# Altium PCB TIDA-01486E1_PCB.PcbDoc (part 1 of 3)
Units mil, origin at the board's own origin, x right, y up, seen from the top; angles counter-clockwise.
Board outline 4100 x 3000 mil, 4 copper layers (Top Layer, Signal Layer 1, Signal Layer 2, Bottom Layer), stack 61.6 mil thick; 140 components, 71 nets, 368 pads, 137 vias.
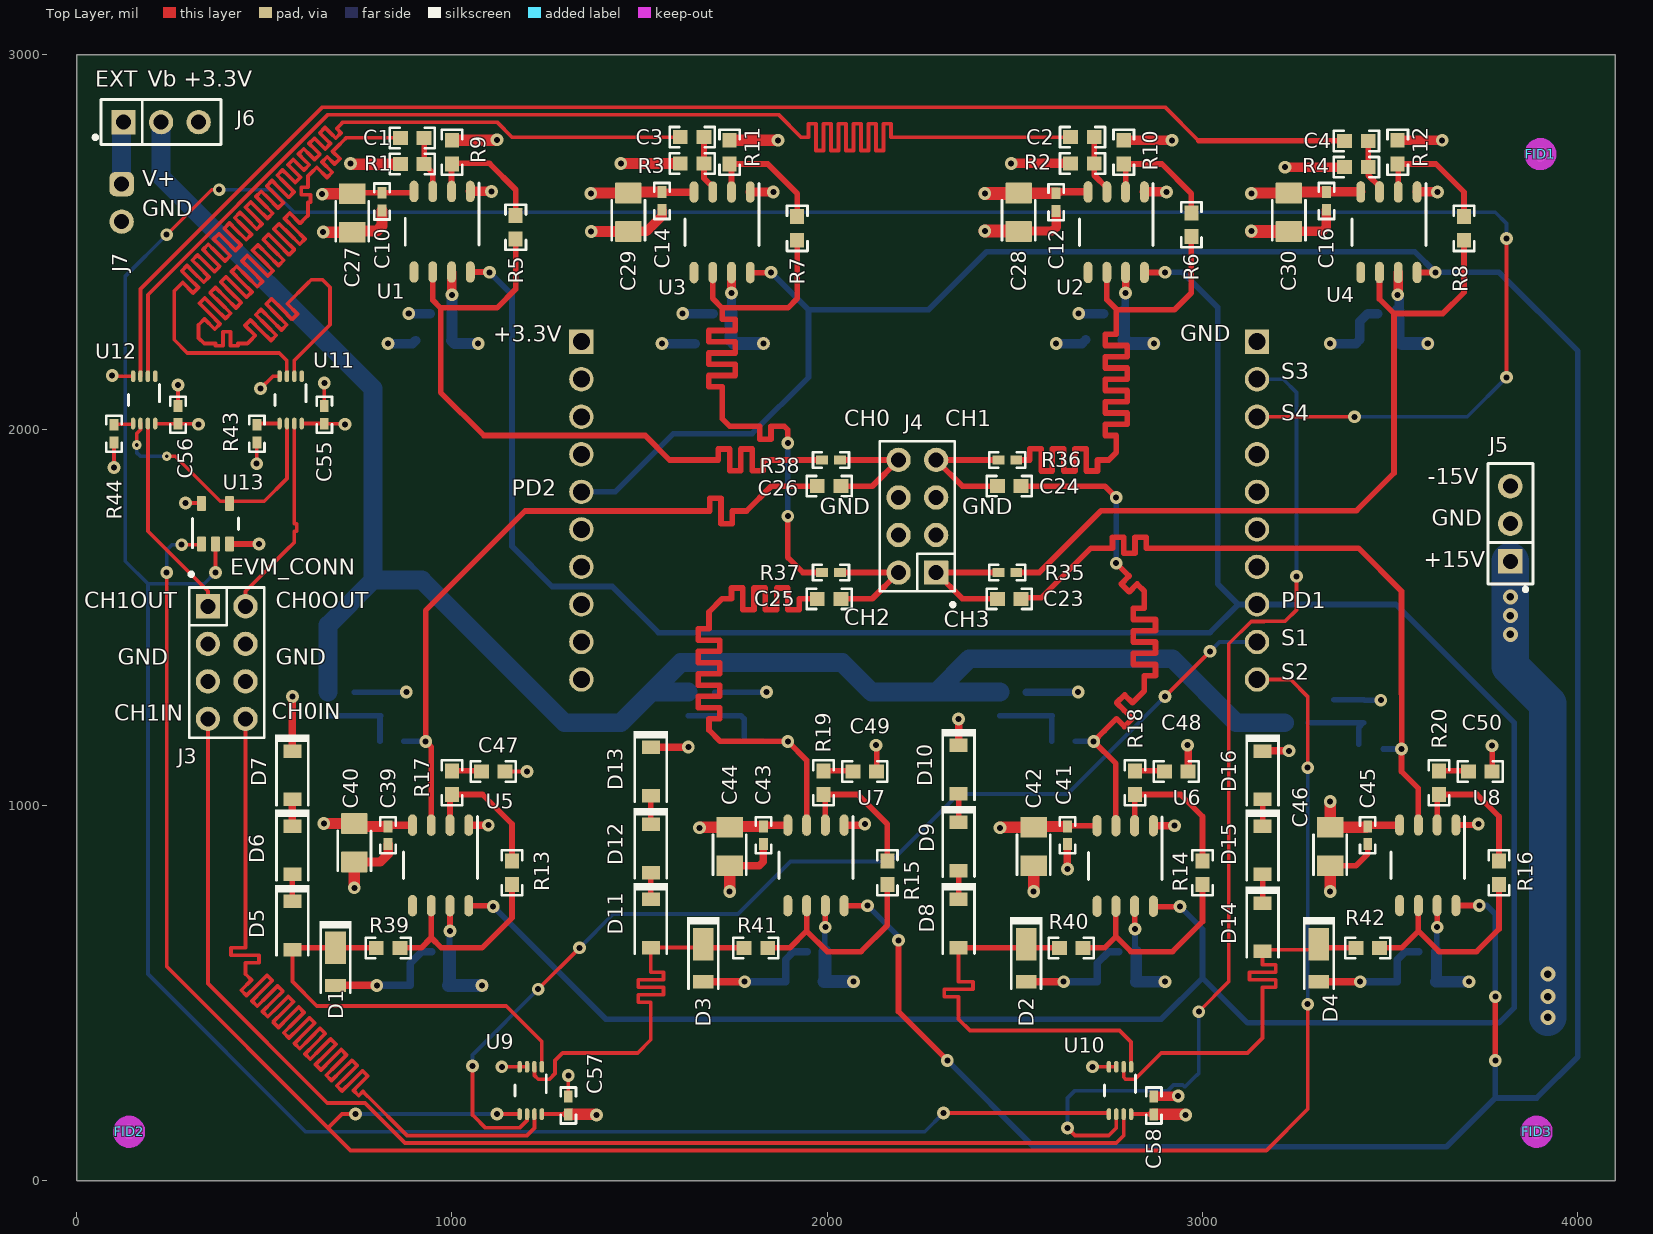
[diagram p0: Top Layer view]
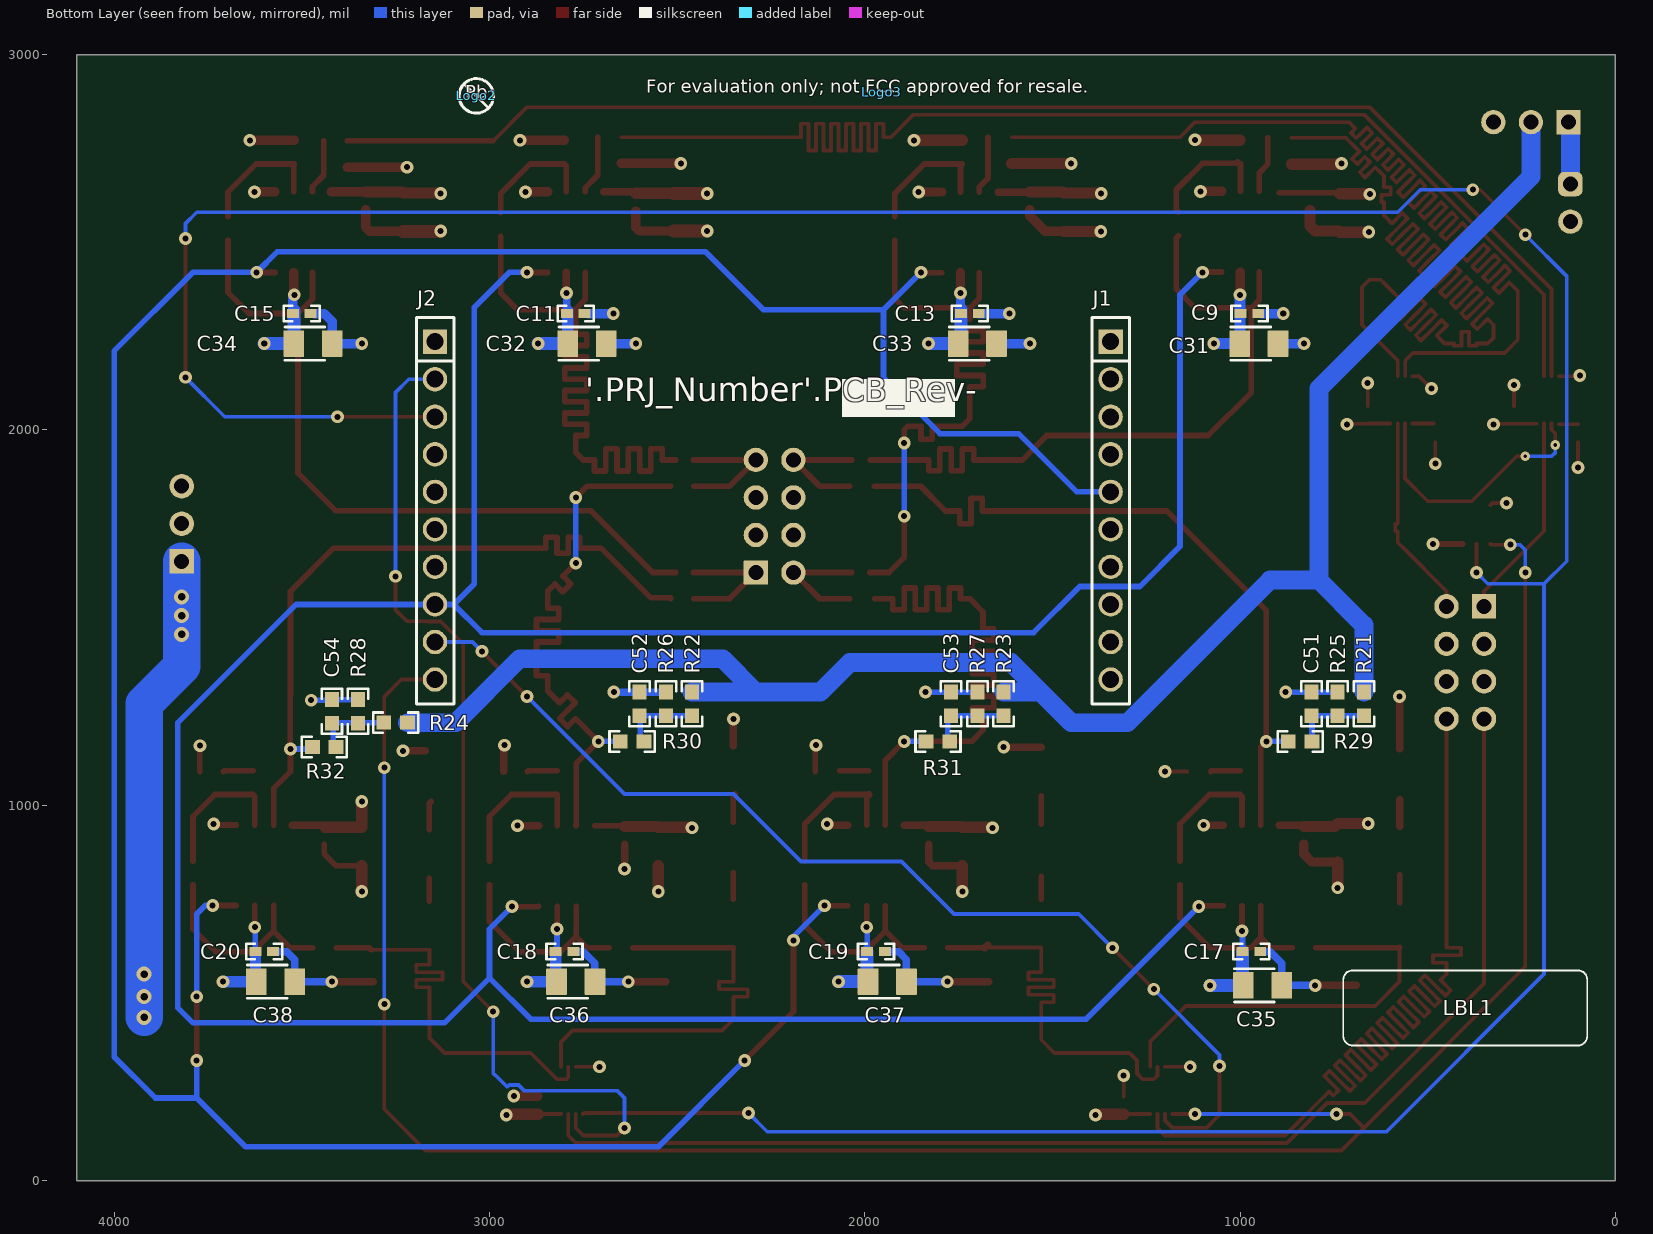
[diagram p1: Bottom Layer view, seen from below]
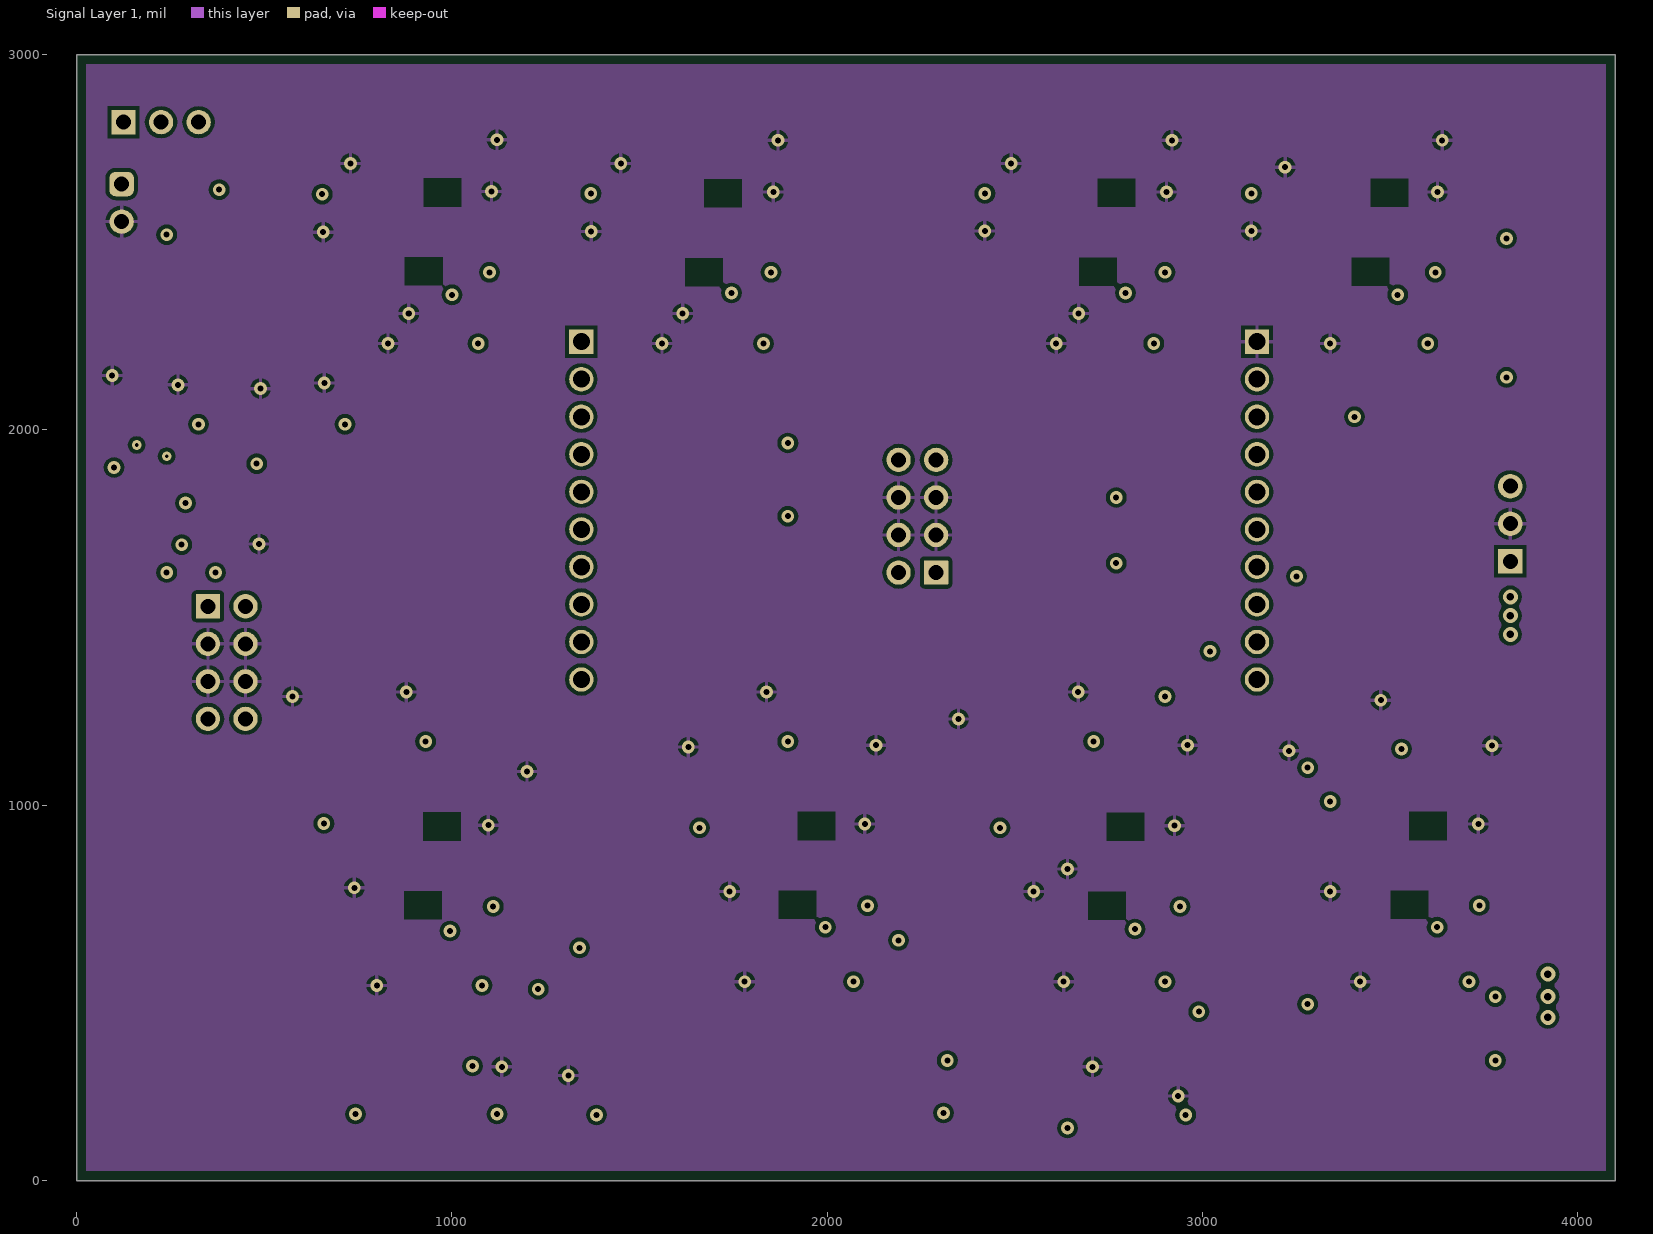
[diagram p2: Signal Layer 1]
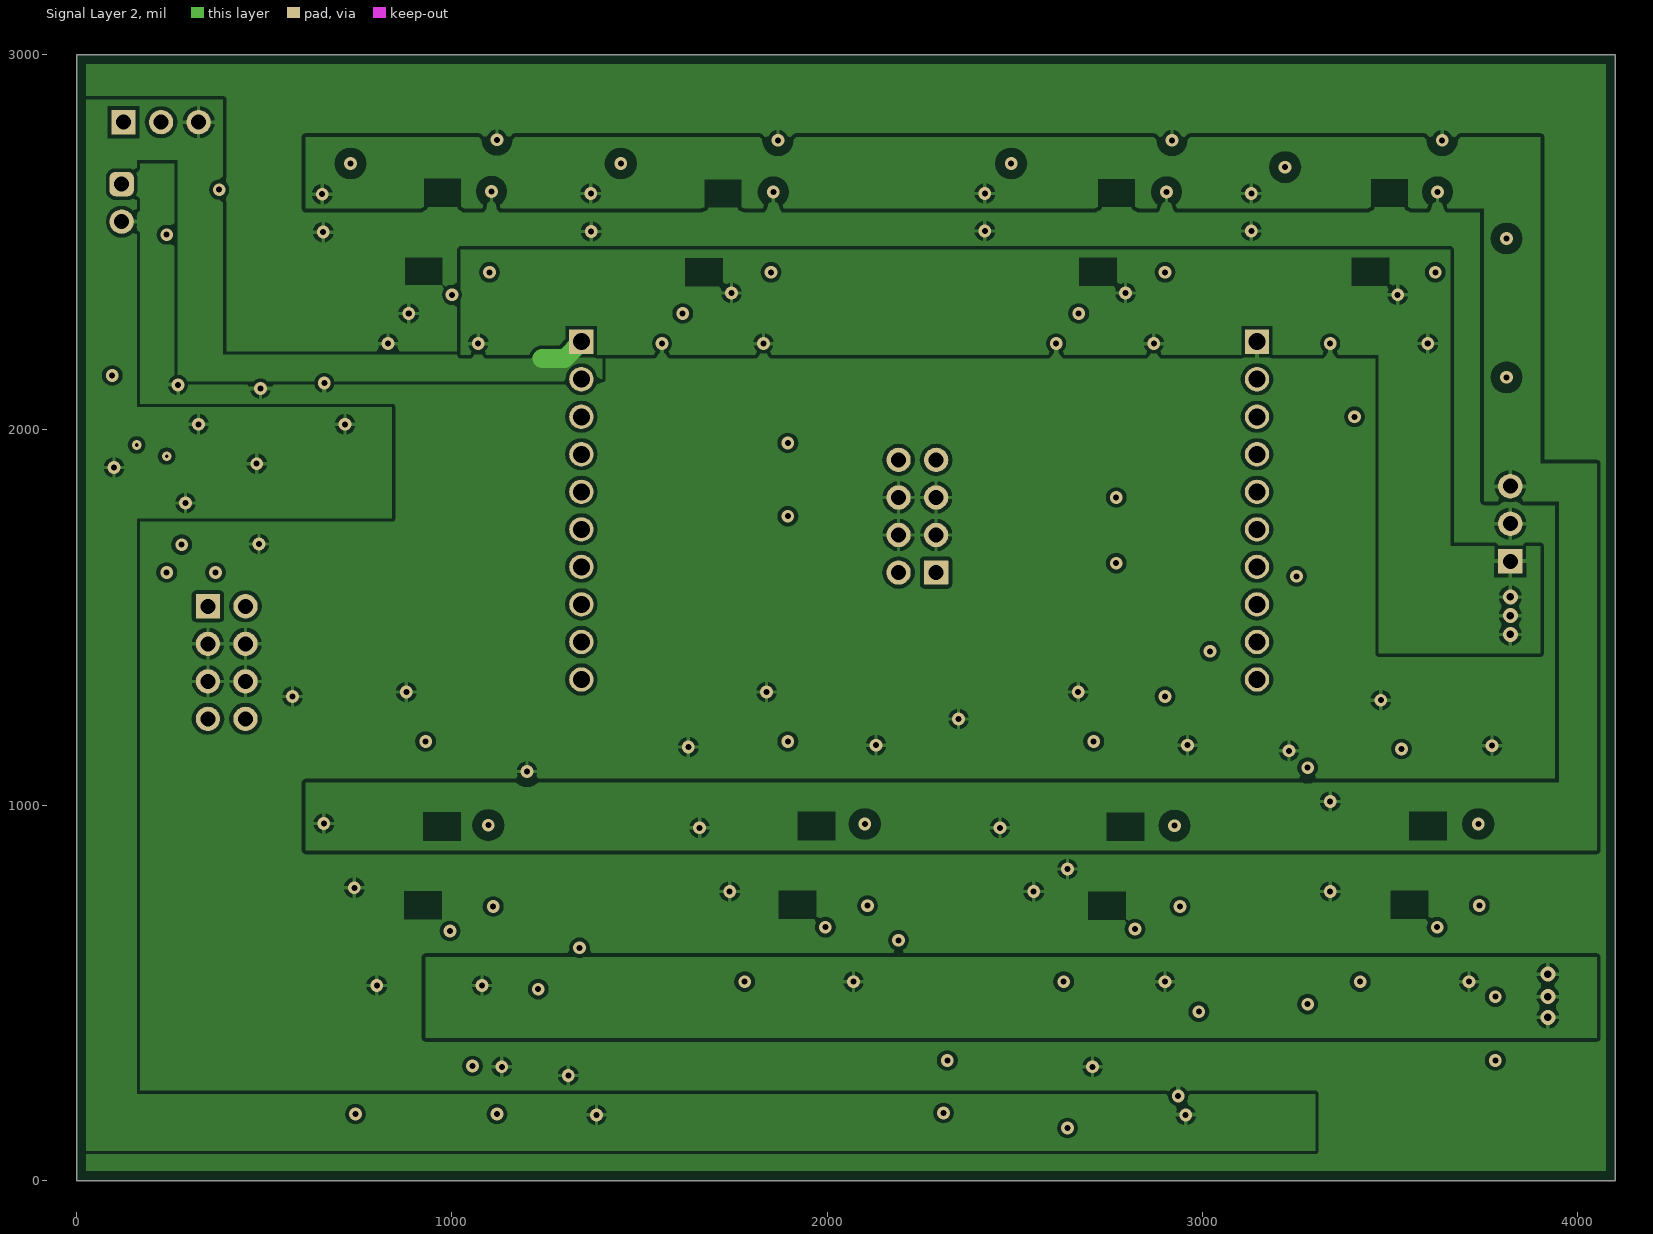
[diagram p3: Signal Layer 2]

## Layer stack, top to bottom
Top Solder: solder mask 0.4, Solder Resist, Dk 3.5
Top Layer: signal copper 1.4
Dielectric 1: prepreg 8, FR-4, Dk 4.2
Signal Layer 1: signal copper 1.4
Dielectric 2: core 40, FR-4, Dk 4.2
Signal Layer 2: signal copper 1.4
Dielectric 3: prepreg 8, FR-4, Dk 4.2
Bottom Layer: signal copper 1.4
Bottom Solder: solder mask 0.4, Solder Resist, Dk 3.5

## Board outline
0,0 4100,0 4100,3000 0,3000

## Design rules (kind name [scope] priority, off if disabled: settings)
AcuteAngle [All] p1: minimum=4.50000000000000E+0001 checktracksonly=FALSE
AssemblyTestPointUsage [All] p1: valid=2
BoardOutlineClearance BoardOutlineClearance_MountingHoles [OnCopper and InComponentClass('Mounting Holes')] p1: gap=40 ignorepadtopadclearanceinfootprint=FALSE
BoardOutlineClearance BoardOutlineClearance_Poly [OnCopper and IsPoly] p2: gap=25 ignorepadtopadclearanceinfootprint=FALSE
BoardOutlineClearance [OnCopper and Not InComponentClass('Logo') and not InComponentClass('FiducialMark') and not InRegion(1000,500,4000,800) and not InPoly] p3: gap=75 ignorepadtopadclearanceinfootprint=FALSE
Clearance Clearance_Keepouts [((IsTrack Or IsArc) And Not InPoly) And IsFree and IsKeepOut vs ((IsTrack Or IsArc) And Not InPoly) And IsFree and IsKeepOut] p1: gap=0 ignorepadtopadclearanceinfootprint=FALSE
Clearance Clearance_Poly [InPolygon] p2: gap=21 ignorepadtopadclearanceinfootprint=TRUE except(0: Arc-Hole Track-Hole SMDPad-Hole THPad-Hole Via-Hole Fill-Hole Poly-Hole Region-Hole Text-Hole; 10: Arc-Fill Arc-Poly Arc-Region Track-Fill Track-Poly Track-Region SMDPad-Fill SMDPad-Poly SMDPad-Region THPad-Fill THPad-Poly THPad-Region Via-Fill Via-Poly Via-Region Fill-Fill Fill-Poly Fill-Region Poly-Poly Poly-Region Region-Region)
Clearance Clearance_FiducialMark [IsKeepOut and InComponentClass('FiducialMark') vs IsPad and InComponentClass('FiducialMark')] p3: gap=0 ignorepadtopadclearanceinfootprint=FALSE
Clearance [All] p4: gap=7.87 ignorepadtopadclearanceinfootprint=FALSE except(0: Arc-Hole Track-Hole SMDPad-Hole THPad-Hole Via-Hole Fill-Hole Poly-Hole Region-Hole Text-Hole)
ComponentClearance ComponentClearance_MountingHoles_FiducialMarks [InComponentClass('Mounting Holes') vs InComponentClass('FiducialMark')] p1: gap=50 collisioncheckmode=3 verticalgap=10 showdistances=FALSE
ComponentClearance ComponentClearance_Shunt [InComponentClass('Header') vs InComponentClass('Shunt')] p2: gap=0 collisioncheckmode=3 verticalgap=0 showdistances=FALSE
ComponentClearance ComponentClearance_Logo [InComponentClass('Logo')] p3: gap=50 collisioncheckmode=3 verticalgap=10 showdistances=FALSE
ComponentClearance ComponentClearance_ScrewToNut [(HasFootprint('NY PMS 440 0025 PH')) vs (HasFootprint('Keystone_1902C'))] p4: gap=5 collisioncheckmode=3 verticalgap=10 showdistances=FALSE
ComponentClearance ComponentClearance_MountingHoles [InComponentClass('Mounting Holes')] p5: gap=250 collisioncheckmode=3 verticalgap=100000 showdistances=FALSE
ComponentClearance ComponentClearance_SmallPassives [HasFootprint('0201*') or HasFootprint('0402*') or HasFootprint('0508') or HasFootprint('0603*') or HasFootprint('0612') or HasFootprint('0805*') or HasFootprint('0815*') or HasFootprint('0830*') or HasFootprint('1206*') or HasFootprint('1210*') or HasFootprint('1808*') or HasFootprint('1812*') or HasFootprint('1825*') or HasFootprint('2010*') or HasFootprint('2220*') or HasFootprint('2225*') or HasFootprint('2512*') or HasFootprint('2728*') or HasFootprint('3518*') vs HasFootprint('0201*') or HasFootprint('0402*') or HasFootprint('0508') or HasFootprint('0603*') or HasFootprint('0612') or HasFootprint('0805*') or HasFootprint('0815*') or HasFootprint('0830*') or HasFootprint('1206*') or HasFootprint('1210*') or HasFootprint('1808*') or HasFootprint('1812*') or HasFootprint('1825*') or HasFootprint('2010*') or HasFootprint('2220*') or HasFootprint('2225*') or HasFootprint('2512*') or HasFootprint('2728*') or HasFootprint('3518*')] p6: gap=14.96 collisioncheckmode=3 verticalgap=10 showdistances=FALSE
ComponentClearance ComponentClearance_THtoSMT [IsThruComponent vs IsSMTComponent] p7: gap=40 collisioncheckmode=3 verticalgap=30 showdistances=FALSE
ComponentClearance ComponentClearance_THtoTH [IsThruComponent vs IsThruComponent] p8: gap=30 collisioncheckmode=3 verticalgap=30 showdistances=FALSE
ComponentClearance [All] p9: gap=30 collisioncheckmode=3 verticalgap=10 showdistances=FALSE
DiffPairsRouting [All] p1: maxlimit=100 minlimit=10 mostfreqgap=10 toplayer_minwidth=15 toplayer_maxwidth=15 toplayer_prefwidth=15 midlayer1_minwidth=15 midlayer1_maxwidth=15 midlayer1_prefwidth=15 midlayer2_minwidth=15 midlayer2_maxwidth=15 midlayer2_prefwidth=15 bottomlayer_minwidth=15 bottomlayer_maxwidth=15 bottomlayer_prefwidth=15 maxuncoupledlength=1000
FabricationTestPointUsage TestPointUsage [All] p1: valid=2 allowmultiple=FALSE
FabricationTestpoint Testpoint [All] p1: side=3 testpointundercomponent=TRUE minsize=40 maxsize=100 preferedsize=60 minholesize=0 maxholesize=40 preferedholesize=32 testpointgrid=1 allowsidetop=TRUE allowsidebottom=TRUE usegrid=TRUE gridtolerance=0.01
FanoutControl Fanout_LCC [IsLCC] p1: bgadir=Out bgaviamode=Centered fanoutstyle=Auto fanoutdirection=Alternating viagrid=1 // Fanout_LCC (Default Rule)
FanoutControl Fanout_BGA [IsBGA] p2: bgadir=Out bgaviamode=Centered fanoutstyle=Auto fanoutdirection=Alternating viagrid=1 // Fanout_BGA (Default Rule)
FanoutControl Fanout_Default [All] p4: bgadir=Out bgaviamode=Centered fanoutstyle=Auto fanoutdirection=Alternating viagrid=1 // Fanout_Default (Default Rule)
FanoutControl Fanout_Small [(CompPinCount < 5)] p5: bgadir=Out bgaviamode=Centered fanoutstyle=Auto fanoutdirection=OutThenIn viagrid=1 // Fanout_Small (Default Rule)
HoleSize [All] p1: absolutevalues=TRUE maxlimit=251 minlimit=7.87 maxpercent=80.000 minpercent=20.000
MinimumAnnularRing MinimumAnnularRing_ThermalPadVias [IsVia and InAnyComponent] p1: minimumring=5.91
MinimumAnnularRing [All] p2: minimumring=8
MinimumSolderMaskSliver MinimumSolderMaskSliver_Logo [InComponentClass('Logo') vs InComponentClass('Logo')] p1: minsoldermaskwidth=0.7
MinimumSolderMaskSliver [All] p2: minsoldermaskwidth=3.94
PlaneConnect [All] p1: planeconnectstyle=Relief reliefexpansion=10 reliefentries=4 reliefconductorwidth=10 reliefairgap=10
PolygonConnect [All] p1: connectstyle=Relief reliefconductorwidth=10 reliefentries=4 polygonreliefangle="90 Angle" airgapwidth=10
RoutingVias ThermalPadVias [IsVia and InAnyComponent] p1: holewidth=7.87 width=19.68 viastyle="Through Hole" minholewidth=7.87 minwidth=19.68 maxholewidth=12.99 maxwidth=23.62
RoutingVias [All] p2: holewidth=16 width=34 viastyle="Through Hole" minholewidth=7.87 minwidth=26 maxholewidth=40 maxwidth=65
SilkToBoardRegionClearance [Not ((IsComment or IsDesignator) And (Hide <> 'False')) and not InRegion(1000,500,4000,800)] p1:
SilkToSilkClearance SilkToSilkClearance_Pb-FreeLogo [(HasFootprint('Pb-Free_Overlay_Medium') OR HasFootprint('Pb-Free_Overlay_Small')) vs (HasFootprint('Pb-Free_Overlay_Medium') OR HasFootprint('Pb-Free_Overlay_Small'))] p1: silktosilkclearance=0
SilkToSilkClearance [All] p2: silktosilkclearance=4
SilkToSolderMaskClearance SilkToComponentPadClearance [(IsPad or IsFill or IsRegion) and InAnycomponent] p1: minsilkscreentomaskgap=3 clearancetoexposedcopper=TRUE
SilkToSolderMaskClearance "Silk to Solder Mask Opening" [All] p2: minsilkscreentomaskgap=4 clearancetoexposedcopper=FALSE
SolderMaskExpansion [All] p1: expansion=1.97
Width [All] p1: maxlimit=100 minlimit=6 preferedwidth=10 checkconnectedcopper=TRUE
15 further rules are at their usual default settings.

## Classes and differential pairs
component class Header: J3 J4 J5 J6 J7
component class TIDA-01486E1_Schematic: C1 C2 C3 C4 C9 C10 C11 C12 C13 C14 C15 C16 C17 C18 C19 C20 C23 C24 C25 C26 C27 C28 C29 C30 C31 C32 C33 C34 C35 C36 C37 C38 C39 C40 C41 C42 C43 C44 C45 C46 C47 C48 C49 C50 C51 C52 C53 C54 C55 C56 C57 C58 D1 D2 D3 D4 D5 D6 D7 D8 D9 D10 D11 D12 D13 D14 D15 D16 J1 J2 J3 J4 J5 J6 J7 R1 R2 R3 R4 R5 R6 R7 R8 R9 R10 R11 R12 R13 R14 R15 R16 R17 R18 R19 R20 R21 R22 R23 R24 R25 R26 R27 R28 R29 R30 R31 R32 R35 R36 R37 R38 R39 R40 R41 R42 R43 R44 U1 U2 U3 U4 U5 U6 U7 U8 U9 U10 U11 U12 U13
component class TIDA-01486E1_Hardware: FID1 FID2 FID3 LBL1 Logo2 Logo3 ZZ1 ZZ2 ZZ3 ZZ4
component class FiducialMark: FID1 FID2 FID3
component class AssemblyNote: ZZ1 ZZ2 ZZ3 ZZ4
component class Label: LBL1

## Components (designator, comment, footprint, x,y, rotation, side; value= is the part's Value field where it differs from the comment)
C1 "GRM188R71H102JA01D" 0603 894.36,2778.15 r180 top value=1000pF
C2 "GRM188R71H102JA01D" 0603 2680,2780 r180 top value=1000pF
C3 "GRM188R71H102JA01D" 0603 1640,2780 r180 top value=1000pF
C4 "GRM188R71H102JA01D" 0603 3410,2770 r180 top value=1000pF
C9 "GRM155R71E104KE14D" 0402 975,2310 r180 bottom value=0.1uF
C10 "GRM155R71E104KE14D" 0402 814.04,2608.46 r270 top value=0.1uF
C11 "GRM155R71E104KE14D" 0402 2770,2310 r180 bottom value=0.1uF
C12 "GRM155R71E104KE14D" 0402 2610,2606.8 r270 top value=0.1uF
C13 "GRM155R71E104KE14D" 0402 1720,2310 r180 bottom value=0.1uF
C14 "GRM155R71E104KE14D" 0402 1560,2610 r270 top value=0.1uF
C15 "GRM155R71E104KE14D" 0402 3500,2310 r180 bottom value=0.1uF
C16 "GRM155R71E104KE14D" 0402 3330,2610 r270 top value=0.1uF
C17 "GRM155R71E104KE14D" 0402 970,610 r180 bottom value=0.1uF
C18 "GRM155R71E104KE14D" 0402 2800,610 r180 bottom value=0.1uF
C19 "GRM155R71E104KE14D" 0402 1970,610 r180 bottom value=0.1uF
C20 "GRM155R71E104KE14D" 0402 3600,610 r180 bottom value=0.1uF
C23 "GRM1885C1H102FA01J" 0603 2485,1550 r0 top value=1000pF
C24 "GRM1885C1H102FA01J" 0603 2485,1850 r0 top value=1000pF
C25 "GRM1885C1H102FA01J" 0603 2005,1550 r0 top value=1000pF
C26 "GRM1885C1H102FA01J" 0603 2005,1850 r0 top value=1000pF
C27 "TPSA685K020R1000" 3216-18 734.36,2578.15 r90 top value=6.8uF
C28 "TPSA685K020R1000" 3216-18 2510,2580 r90 top value=6.8uF
C29 "TPSA685K020R1000" 3216-18 1470,2580 r90 top value=6.8uF
C30 "TPSA685K020R1000" 3216-18 3230,2580 r90 top value=6.8uF
C31 "TPSA685K020R1000" 3216-18 950,2230 r180 bottom value=6.8uF
C32 "TPSA685K020R1000" 3216-18 2740,2230 r180 bottom value=6.8uF
C33 "TPSA685K020R1000" 3216-18 1700,2230 r180 bottom value=6.8uF
C34 "TPSA685K020R1000" 3216-18 3470,2230 r180 bottom value=6.8uF
C35 "TPSA685K020R1000" 3216-18 940,520 r180 bottom value=6.8uF
C36 "TPSA685K020R1000" 3216-18 2770,530 r180 bottom value=6.8uF
C37 "TPSA685K020R1000" 3216-18 1940,530 r180 bottom value=6.8uF
C38 "TPSA685K020R1000" 3216-18 3570,530 r180 bottom value=6.8uF
C39 "GRM155R71E104KE14D" 0402 830,920 r270 top value=0.1uF
C40 "TPSA685K020R1000" 3216-18 740,900 r90 top value=6.8uF
C41 "GRM155R71E104KE14D" 0402 2640,920 r270 top value=0.1uF
C42 "TPSA685K020R1000" 3216-18 2550,890 r90 top value=6.8uF
C43 "GRM155R71E104KE14D" 0402 1830,920 r270 top value=0.1uF
C44 "TPSA685K020R1000" 3216-18 1740,890 r90 top value=6.8uF
C45 "GRM155R71E104KE14D" 0402 3440,920 r270 top value=0.1uF
C46 "TPSA685K020R1000" 3216-18 3340,890 r90 top value=6.8uF
C47 "GMK107AB7105KAHT" 0603 1110,1090 r0 top value=1uF
C48 "GMK107AB7105KAHT" 0603 2930,1090 r0 top value=1uF
C49 "GMK107AB7105KAHT" 0603 2100,1090 r0 top value=1uF
C50 "GMK107AB7105KAHT" 0603 3740,1090 r0 top value=1uF
C51 "EMK107BB7225MA-T" 0603 810,1270 r90 bottom value=2.2uF
C52 "EMK107BB7225MA-T" 0603 2600,1270 r90 bottom value=2.2uF
C53 "EMK107BB7225MA-T" 0603 1770,1270 r90 bottom value=2.2uF
C54 "EMK107BB7225MA-T" 0603 3420,1250 r90 bottom value=2.2uF
C55 "GRM155R71E104KE14D" 0402 660,2040 r90 top value=0.1uF
C56 "GRM155R71E104KE14D" 0402 270,2040 r90 top value=0.1uF
C57 "GRM155R71E104KE14D" 0402 1310,200 r90 top value=0.1uF
C58 "GRM155R71E104KE14D" 0402 2870,200 r90 top value=0.1uF
D1 "DFLS130L-7" PowerDI123 690,570 r270 top value=30V
D2 "DFLS130L-7" PowerDI123 2530,580 r270 top value=30V
D3 "DFLS130L-7" PowerDI123 1670,580 r270 top value=30V
D4 "DFLS130L-7" PowerDI123 3310,580 r270 top value=30V
D5 "1N4148W-7-F" SOD-123 575,680 r270 top value=100V
D6 "1N4148W-7-F" SOD-123 575,880 r270 top value=100V
D7 "1N4148W-7-F" SOD-123 575,1080 r270 top value=100V
D8 "1N4148W-7-F" SOD-123 2350,685 r270 top value=100V
D9 "1N4148W-7-F" SOD-123 2350,890 r270 top value=100V
D10 "1N4148W-7-F" SOD-123 2350,1095 r270 top value=100V
D11 "1N4148W-7-F" SOD-123 1530,685 r270 top value=100V
D12 "1N4148W-7-F" SOD-123 1530,885 r270 top value=100V
D13 "1N4148W-7-F" SOD-123 1530,1090 r270 top value=100V
D14 "1N4148W-7-F" SOD-123 3160,675 r270 top value=100V
D15 "1N4148W-7-F" SOD-123 3160,880 r270 top value=100V
D16 "1N4148W-7-F" SOD-123 3160,1080 r270 top value=100V
FID1 "Fiducial" Fiducial10-20 3900,2734.81 r0 top
FID2 "Fiducial" Fiducial10-20 140,130 r0 top
FID3 "Fiducial" Fiducial10-20 3890,130 r0 top
J1 "SSW-110-23-F-S" CONN_SSW-110-23-F-S 1345,1785 r90 bottom
J2 "SSW-110-23-F-S" CONN_SSW-110-23-F-S 3145,1785 r90 bottom
J3 "TSW-104-07-G-D" TSW-104-07-G-D 400,1380 r270 top
J4 "TSW-104-07-G-D" TSW-104-07-G-D 2240,1770 r90 top
J5 "TSW-103-07-G-S" TSW-103-07-X-S 3820,1750 r90 top
J6 "TSW-103-07-G-S" TSW-103-07-X-S 225,2820 r0 top
J7 "TSW-102-07-G-S" TSW-102-07-G-S 120,2605 r270 top
LBL1 "Size: 0.65\" x 0.20 \"" Label_650x200 400,460 r180 bottom
Logo2 "Pb-Free Symbol" Pb-Free_Overlay_Small 3035,2890 r180 bottom
Logo3 "FCC disclaimer" FCC_disclaimer 1955,2900 r180 bottom
R1 "RC0603FR-071KL" 0603 894.36,2708.15 r0 top value=1.00k
R2 "RC0603FR-071KL" 0603 2680,2710 r0 top value=1.00k
R3 "RC0603FR-071KL" 0603 1640,2710 r0 top value=1.00k
R4 "RC0603FR-071KL" 0603 3410,2700 r0 top value=1.00k
R5 "CRCW0603866RFKEA" 0603 1170,2540 r270 top value=866
R6 "CRCW0603866RFKEA" 0603 2970,2546.8 r270 top value=866
R7 "CRCW0603866RFKEA" 0603 1920,2536.8 r270 top value=866
R8 "CRCW0603866RFKEA" 0603 3696.5,2536.8 r270 top value=866
R9 "CRCW060395R3FKEA" 0603 1000,2740 r270 top value=95.3
R10 "CRCW060395R3FKEA" 0603 2790,2740 r270 top value=95.3
R11 "CRCW060395R3FKEA" 0603 1740,2740 r270 top value=95.3
R12 "CRCW060395R3FKEA" 0603 3520,2740 r270 top value=95.3
R13 "CRCW0603866RFKEA" 0603 1160,820 r270 top value=866
R14 "CRCW0603866RFKEA" 0603 3000,820 r270 top value=866
R15 "CRCW0603866RFKEA" 0603 2160,820 r270 top value=866
R16 "CRCW0603866RFKEA" 0603 3790,820 r270 top value=866
R17 "CRCW060395R3FKEA" 0603 1000,1060 r270 top value=95.3
R18 "CRCW060395R3FKEA" 0603 2820,1060 r270 top value=95.3
R19 "CRCW060395R3FKEA" 0603 1990,1060 r270 top value=95.3
R20 "CRCW060395R3FKEA" 0603 3630,1060 r270 top value=95.3
R21 "RT0603BRD07100KL" 0603 670,1270 r270 bottom value=100k
R22 "RT0603BRD07100KL" 0603 2460,1270 r270 bottom value=100k
R23 "RT0603BRD07100KL" 0603 1630,1270 r270 bottom value=100k
R24 "RT0603BRD07100KL" 0603 3250,1220 r0 bottom value=100k
R25 "RT0603BRD0724K9L" 0603 740,1270 r270 bottom value=24.9k
R26 "RT0603BRD0724K9L" 0603 2530,1270 r270 bottom value=24.9k
R27 "RT0603BRD0724K9L" 0603 1700,1270 r270 bottom value=24.9k
R28 "RT0603BRD0724K9L" 0603 3350.07,1250 r270 bottom value=24.9k
R29 "RMCF0603ZT0R00" 0603 840,1170 r0 bottom value=0
R30 "RMCF0603ZT0R00" 0603 2620,1170 r0 bottom value=0
R31 "RMCF0603ZT0R00" 0603 1805,1170 r0 bottom value=0
R32 "RMCF0603ZT0R00" 0603 3440,1155 r0 bottom value=0
R35 "CRCW0402200RFKED" 0402 2480,1620 r180 top value=200
R36 "CRCW0402200RFKED" 0402 2480,1920 r180 top value=200
R37 "CRCW0402200RFKED" 0402 2010,1620 r180 top value=200
R38 "CRCW0402200RFKED" 0402 2010,1920 r180 top value=200
R39 "CRCW060310R0JNEAHP" 0603 830,620 r180 top value=10
R40 "CRCW060310R0JNEAHP" 0603 2650,620 r180 top value=10
R41 "CRCW060310R0JNEAHP" 0603 1810,620 r180 top value=10
R42 "CRCW060310R0JNEAHP" 0603 3440,620 r180 top value=10
R43 "CRCW040210K0JNED" 0402 480.32,1990 r90 top value=10k
R44 "CRCW040210K0JNED" 0402 100,1990 r90 top value=10k
U1 "THS3095D" D0008A_N 974.04,2528.15 r270 top
U2 "THS3095D" D0008A_N 2770,2526.8 r270 top
U3 "THS3095D" D0008A_N 1720,2526.49 r270 top
U4 "THS3095D" D0008A_N 3496.5,2526.8 r270 top
U5 "THS3095D" D0008A_N 970,839.68 r270 top
U6 "THS3095D" D0008A_N 2794.04,838.15 r270 top
U7 "THS3095D" D0008A_N 1970,839.68 r270 top
U8 "THS3095D" D0008A_N 3600,840 r270 top
U9 "TS5A3357DCUR" DCU0008A_N 1210,240 r270 top
U10 "TS5A3357DCUR" DCU0008A_N 2780,240 r270 top
U11 "TS5A3357DCUR" DCU0008A_N 570.31,2080 r270 top
U12 "TS5A3357DCUR" DCU0008A_N 180,2080 r270 top
U13 "SN74LVC1G08DBVR" DBV0005A_N 370,1750 r90 top
ZZ1 "This Assembly Note is for PCB labels only" AssemblyNoteLabel 305,5488 r0 top
ZZ2 "This Assembly Note will show in the PcbDoc and associated outputs" AssemblyNote 305,5379.11 r0 top
ZZ3 "This Assembly Note will show in the PcbDoc and associated outputs" AssemblyNote 305,5290.56 r0 top
ZZ4 "This Assembly Note will show in the PcbDoc and associated outputs" AssemblyNote 305,5202 r0 top

## Footprints (in the part's own frame and the unit in brackets; to place one, negate y for a bottom-side part, rotate by r counter-clockwise, add the part's x,y. Pads: shape width x height; smd on the part's side, far side on the other; paste and mask are expansions set on the pad)
0402 [mm] "0402 from SM-752 data"
  rect 0.8x0.6 smd: 1(-0.6,0) 2(0.6,0)
  silkscreen extent -1.22,-0.52 1.22,0.52, body extent -0.55,-0.3 0.55,0.3, height 0.6
0603 [mm] "0603 from SM-752 data"
  rect 1x0.95 smd: 1(-0.8,0) 2(0.8,0)
  silkscreen extent -1.52,-0.69 1.52,0.69, body extent -0.87,-0.47 0.87,0.47, height 1
3216-18 [mm] "Based on AVX recommendation in http://www.avx.com/download/software/literature/AVX-Footprint-Library.pdf"
  rrect7% 1.4x1.8 smd: 1(-1.3,0) 2(1.3,0)
  silkscreen extent -1.9,-1.12 0.8,1.12, body extent -1.7,-0.9 1.7,0.9, height 1.82
AssemblyNote [mil] "Assembly Note"
AssemblyNoteLabel [mil] "Assembly Note for PCB Labels"
CONN_SSW-110-23-F-S [mm] "SAMTEC"
  rect 1.65x1.65 hole 1.15: 1(11.43,0)
  round 1.65 hole 1.15: 2(8.89,0) 3(6.35,0) 4(3.81,0) 5(1.27,0) 6(-1.27,0) 7(-3.81,0) 8(-6.35,0) 9(-8.89,0) 10(-11.43,0)
  silkscreen extent -13.08,-1.27 13.08,1.27, body extent -13,-1.27 13,1.27, height 8.59
D0008A_N [mm] "SOIC, 8-Leads, Body 4.9x3.9mm, Pitch 1.27mm, IPC Medium Density"
  oval 1.45x0.6 smd: 1(-2.725,1.905) 2(-2.725,0.635) 3(-2.725,-0.635) 4(-2.725,-1.905) 5(2.725,-1.905) 6(2.725,-0.635) 7(2.725,0.635) 8(2.725,1.905)
  silkscreen extent -3.3,-2.5 0.9,2.5, body extent -3,-2.45 3,2.45, height 1.63
DBV0005A_N [mm] "SOT23, 5-Leads, Body 2.9x1.6mm, Pitch 0.95mm, Lead Span 2.8mm, IPC Medium Density"
  rrect17% 1x0.6 smd: 1(-1.375,0.95) 2(-1.375,0) 3(-1.375,-0.95) 4(1.375,-0.95) 5(1.375,0.95)
  silkscreen extent -1.63,-1.55 0.38,1.55, body extent -1.42,-1.46 1.42,1.46, height 1.09
DCU0008A_N [mm] "TSSOP, 8-Leads, Body 2x2.3mm, Pitch 0.5mm, IPC Medium Density"
  oval 0.8x0.3 smd: 1(-1.6,0.75) 2(-1.6,0.25) 3(-1.6,-0.25) 4(-1.6,-0.75) 5(1.6,-0.75) 6(1.6,-0.25) 7(1.6,0.25) 8(1.6,0.75)
  silkscreen extent -1.05,-1.05 0.38,1.05, body extent -1.56,-1 1.56,1, height 0.9
FCC_disclaimer [mil]
Fiducial10-20 [mm]
  round 1 smd mask+0.5: 1(0,0)
  Top Layer keep-out circle w1.178: c0,0 r0.5
Label_650x200 [mil] "Thermal Transfer Label"
  silkscreen extent -325,-100 325,100, body extent -325,-100 325,100, height 1
Pb-Free_Overlay_Small [mil]
  silkscreen extent -46,-46 46,46
PowerDI123 [mm] "Diodes Inc recommended land pattern, document number DS30628 Rev. 6-2"
  rect 2.2x1.4 smd: 1(-1.275,0)
  rect 0.9x1.4 smd: 2(1.275,0)
  silkscreen extent -3.1,-1.09 1.76,1.09, body extent -2.38,-0.97 1.52,0.96, height 1
SOD-123 [mm] "On Semi recommended land pattern"
  rect 0.915x1.22 smd: 1(-1.637,0) 2(1.637,0)
  silkscreen extent -2.74,-1.17 2.03,1.17, body extent -1.93,-0.9 1.93,0.9, height 1.35
TSW-102-07-G-S [mm] "Samtec 100mil, 1x2, 230 mil above insulator"
  rrect50% 1.65x1.65 hole 1.016: 1(-1.27,0)
  round 1.65 hole 1.016: 2(1.27,0)
  body extent -2.54,-1.27 2.54,1.27, height 8.38
TSW-103-07-X-S [mm] "Samtec Header, 100mil, 1x3"
  rect 1.65x1.65 hole 1.016: 1(-2.54,0)
  round 1.65 hole 1.016: 2(0,0) 3(2.54,0)
  silkscreen extent -4.57,-1.52 4.06,1.52, body extent -3.81,-1.27 3.81,1.27, height 8.38
TSW-104-07-G-D [mm] "Samtec 100mil, 2x4, 230 mil above insulator"
  rrect6% 1.65x1.65 hole 1.016: 1(-3.81,-1.27)
  round 1.65 hole 1.016: 2(-3.81,1.27) 3(-1.27,-1.27) 4(-1.27,1.27) 5(1.27,-1.27) 6(1.27,1.27) 7(3.81,-1.27) 8(3.81,1.27)
  silkscreen extent -6.1,-2.54 5.08,2.54, body extent -5.08,-2.54 5.08,2.54, height 8.38

## Part data
C1 C2 C3 C4: "CAP, CERM, 1000 pF, 50 V,+/- 5%, X7R, 0603", Cap_Case=0603, Manufacturer=MuRata, Supplier Part Number 1=490-9733-1-ND, TempCo=X7R, Tolerance_%=5, Value1=Unknown, Value2=50V, ValueDisplayed=1000pF, AEC Category=Q200, AEC Grade=N/A, AEC Qualified=N, Cap_F=0.000000001, ComponentLink1Description="Datasheet link", ComponentLink1URL=http://psearch.murata.com/capacitor/product/GRM188R71H102JA01%23.pdf, CompType=Capacitor, LatestRevisionDate=2017-06-02, MountType=SMT, PackageReference=0603, PartNumber=GRM188R71H102JA01D, Polarized=N, Published=2008-06-19, Publisher="Texas Instruments", RoHS=Y, SizeArea_mm2=1.28, SizeAreaWB_mm2=4.68, SizeX_mm=1.6, SizeY_mm=0.8, SizeZ_mm=1, Supplier 1=Digi-Key, Supplier 2=Mouser, Supplier Part Number 2=81-GRM39X102J50D, SymbolVersion=2008-07-09, TaMax_C=125, TaMin_C=-55, Technology=Ceramic, U/M=EA, VDC_V=50
C9 C10 C11 C12 C13 C14 C15 C16 C17 C18 C19 C20 C39 C41 C43 C45 C55 C56 C57 C58: "CAP, CERM, 0.1 µF, 25 V,+/- 10%, X7R, 0402", Cap_Case=0402, Manufacturer=MuRata, Supplier Part Number 1=490-10698-1-ND, TempCo=X7R, Tolerance_%=10, Value1=Unknown, Value2=25V, ValueDisplayed=0.1µF, AEC Category=Q200, AEC Grade=N/A, AEC Qualified=N, Cap_F=0.0000001, ComponentLink1Description="Datasheet link", ComponentLink1URL=http://search.murata.co.jp/Ceramy/image/img/A01X/G101/ENG/GRM155R71E104KE14-01.pdf, CompType=Capacitor, Green_EU RoHS=Passed, Green_EU RoHS-2=Incomplete, Green_Lifecycle=Active, Green_REACh=Passed, LatestRevisionDate=2017-06-02, MountType=SMT, PackageReference=0402, PartNumber=GRM155R71E104KE14D, Polarized=N, Published=2008-06-19, Publisher="Texas Instruments", RoHS=Y, SizeArea_mm2=0.5, SizeAreaWB_mm2=3, SizeX_mm=1, SizeY_mm=0.5, SizeZ_mm=0.6, Supplier 1=Digi-Key, Supplier 2=Newark, Supplier 3=Mouser, Supplier Part Number 2=31Y1751, Supplier Part Number 3=81-GRM155R71E104KE4D, SymbolVersion=2008-07-09, TaMax_C=125, TaMin_C=-55, Technology=Ceramic, U/M=EA, VDC_V=25
C23 C24 C25 C26: "CAP, CERM, 1000 pF, 50 V,+/- 1%, C0G/NP0, 0603", Cap_Case=0603, Manufacturer=MuRata, Supplier Part Number 1=490-6377-1-ND, TempCo=C0G/NP0, Tolerance_%=1, Value1=Unknown, Value2=50V, ValueDisplayed=1000pF, AEC Category=Q200, AEC Qualified=?, Cap_F=0.000000001, ComponentLink1Description="Datasheet link", ComponentLink1URL=http://search.murata.co.jp/Ceramy/image/img/A01X/G101/ENG/GRM1885C1H102FA01-01.pdf, CompType=Capacitor, Green_EU RoHS=Incomplete, Green_EU RoHS-2=Incomplete, Green_Lifecycle="Not Set", Green_REACh=Incomplete, LatestRevisionDate=2017-06-02, MountType=SMT, PackageReference=0603, PartNumber=GRM1885C1H102FA01J, Polarized=N, Published=2008-06-19, Publisher="Texas Instruments", RoHS=Y, SizeArea_mm2=1.28, SizeAreaWB_mm2=4.68, SizeX_mm=1.6, SizeY_mm=0.8, SizeZ_mm=1, Supplier 1=Digi-Key, Supplier 2=Mouser, Supplier Part Number 2=81-GRM1885C1H102FA1J, SymbolVersion=2008-07-09, TaMax_C=125, TaMin_C=-55, Technology=Ceramic, U/M=EA, VDC_V=50
C27 C28 C29 C30 C31 C32 C33 C34 C35 C36 C37 C38 C40 C42 C44 C46: "CAP, TA, 6.8 µF, 20 V, +/- 10%, 1 ohm, SMD", Cap_Case=A, Manufacturer=AVX, Supplier Part Number 1=478-3094-1-ND, Tolerance_%=10, Value1="1 ohm", Value2=20V, ValueDisplayed=6.8µF, AEC Category=Q200, AEC Qualified=?, Cap_F=0.0000068, ComponentLink1Description="Datasheet link", ComponentLink1URL=http://www.avx.com/docs/masterpubs/tantniob.pdf, CompType=Capacitor, ESR_ohm=1, IRMS_A=0.246, LatestRevisionDate=2017-03-13, LatestRevisionNote="Updated supplier links", MountType=SMT, PackageReference=3216-18, PartNumber=TPSA685K020R1000, Polarized=Y, Publisher="Texas Instruments", RoHS=Y, Series=TPS, SizeArea_mm2=5.12, SizeAreaWB_mm2=10.92, SizeX_mm=3.2, SizeY_mm=1.6, SizeZ_mm=1.8, Supplier 1=Digi-Key, Supplier 2=Newark, Supplier 3=Mouser, Supplier Part Number 2=75M2902, Supplier Part Number 3=581-TPSA685K020R1000, SymbolVersion=2008-07-09, TaMax_C=125, TaMin_C=-55, Technology=TA, U/M=EA, VDC_V=20
C47 C48 C49 C50: "CAP, CERM, 1 µF, 35 V,+/- 10%, X7R, AEC-Q200 Grade 0, 0603", Cap_Case=0603, Manufacturer="Taiyo Yuden", Supplier Part Number 1=587-3352-1-ND, TempCo=X7R, Tolerance_%=10, Value1=Unknown, Value2=35V, ValueDisplayed=1µF, AEC Category=Q200, AEC Grade=0, AEC Qualified=Y, Cap_F=0.000001, ComponentLink1Description="Datasheet link", ComponentLink1URL=http://www.yuden.co.jp/productdata/catalog/en/mlcc01_hq_e.pdf, CompType=Capacitor, LatestRevisionDate=2017-06-02, MountType=SMT, PackageReference=0603, PartNumber=GMK107AB7105KAHT, Polarized=N, Published=2008-06-19, Publisher="Texas Instruments", RoHS=Y, SizeArea_mm2=1.28, SizeAreaWB_mm2=4.68, SizeX_mm=1.6, SizeY_mm=0.8, SizeZ_mm=1, Supplier 1=Digi-Key, Supplier 2=Newark, Supplier 3=Mouser, Supplier Part Number 2=68X1426, Supplier Part Number 3=963-GMK107AB7105KAHT, SymbolVersion=2008-07-09, TaMax_C=125, TaMin_C=-55, Technology=Ceramic, U/M=EA, VDC_V=35
C51 C52 C53 C54: "CAP, CERM, 2.2 µF, 16 V,+/- 10%, X7R, 0603", Cap_Case=0603, Manufacturer="Taiyo Yuden", Supplier Part Number 1=587-4864-1-ND, TempCo=X7R, Tolerance_%=10, Value1=Unknown, Value2=16V, ValueDisplayed=2.2µF, AEC Category=Q200, AEC Grade=N/A, AEC Qualified=N, Cap_F=0.0000022, ComponentLink1Description="Datasheet link", ComponentLink1URL=http://www.yuden.co.jp/productdata/catalog/en/mlcc_all_e.pdf, CompType=Capacitor, LatestRevisionDate=2017-06-02, MountType=SMT, PackageReference=0603, PartNumber=EMK107BB7225MA-T, Polarized=N, Published=2008-06-19, Publisher="Texas Instruments", RoHS=Y, SizeArea_mm2=1.28, SizeAreaWB_mm2=4.68, SizeX_mm=1.6, SizeY_mm=0.8, SizeZ_mm=1, Supplier 1=Digi-Key, Supplier 2=Mouser, Supplier Part Number 2=963-EMK107BB7225MA-T, SymbolVersion=2008-07-09, TaMax_C=125, TaMin_C=-55, Technology=Ceramic, U/M=EA, VDC_V=16
D1 D2 D3 D4: "Diode, Schottky, 30 V, 1 A, PowerDI123", Manufacturer="Diodes Inc.", Supplier Part Number 1=DFLS130LDICT-ND, Value1=1A, Value2=0.31V, AEC Category=Q101, AEC Qualified=N, ComponentLink1Description="Datasheet link", ComponentLink1URL=http://www.diodes.com/_files/datasheets/ds30492.pdf, CompType=Diode, Green_EU RoHS=Incomplete, Green_EU RoHS-2=Incomplete, Green_Lifecycle="Not Set", Green_REACh=Incomplete, Io_A=1, LatestRevisionDate=2017-05-30, MountType=SMT, PackageReference=PowerDI123, PartNumber=DFLS130L-7, Published=2008-06-26, Publisher="Texas Instruments", RoHS=Y, SizeArea_mm2=6.586, SizeAreaWB_mm2=13.066, SizeX_mm=3.7, SizeY_mm=1.78, SizeZ_mm=0.98, Supplier 1=Digi-Key, Supplier 2=Newark, Supplier 3=Mouser, Supplier Part Number 2=12T1975, Supplier Part Number 3=621-DFLS130L, SymbolVersion=2008-12-08, TJmax_C=125, Type=Schottky, U/M=EA, Vf_V=0.31, Vr_V=30
D5 D6 D7 D8 D9 D10 D11 D12 D13 D14 D15 D16: library part CMP-0029001-1, "Diode, Ultrafast, 100 V, 0.15 A, SOD-123", Manufacturer="Diodes Inc.", Supplier Part Number 1=1N4148W-FDICT-ND, Value1=0.15A, Value2=1.25V, AEC Category=Q101, AEC Qualified=?, ComponentLink1Description="Datasheet link", ComponentLink1URL=http://www.diodes.com/datasheets/ds30086.pdf, CompType=Diode, Green_EU RoHS=Passed, Green_EU RoHS-2=Passed, Green_Lifecycle=Active, Green_REACh=Passed, Io_A=1.5dA, LatestRevisionDate=2017-05-08, MountType=SMT, PackageReference=SOD-123, PartNumber=1N4148W-7-F, Published=2008-06-26, Publisher="Texas Instruments", RoHS=Y, SizeArea_mm2=6.545, SizeAreaWB_mm2=13.095, SizeX_mm=3.85, SizeY_mm=1.7, SizeZ_mm=1.35, Supplier 1=Digi-Key, Supplier 2=Mouser, Supplier 3=Farnell, Supplier Part Number 2=621-1N4148W-F, Supplier Part Number 3=1776392, TJmax_C=150°C, Type=Ultrafast, U/M=EA, Vf_V=1.25V, Vr_V=100V
FID1 FID2 FID3: "Fiducial mark.  There is nothing to buy or mount.", Manufacturer=N/A, ClassName=FiducialMark, CompType=Fiducial, LatestRevisionDate=2016-12-05, LatestRevisionNote="Added Alternate PartNumber and Alternate Manufacturer parameters to appropriate components.", MountType=N/A, PackageReference=N/A, PartNumber=N/A, Publisher="Texas Instruments", SymbolCreator=codlsc, SymbolVersion=2009-11-4
J1 J2: library part CMP-0075441-1, "Connector, Receptacle, 100mil, 10x1, Gold plated, TH", Manufacturer=Samtec, CNHeader=False, ComponentLink1Description="Datasheet URL", ComponentLink1URL=http://www.samtec.com/technical-specifications/default.aspx?SeriesMaster=SSW, CompType="Socket Strip", CT=True, Green_EU RoHS=Passed, Green_EU RoHS-2=Passed, Green_Lifecycle=Active, Green_REACh=Passed, LatestRevisionDate=2017-07-12, MountType=TH, PackageReference="10x1 Receptacle", PartNumber=SSW-110-23-F-S, Publisher="Texas Instruments", RoHS=Y
J3 J4: library part CMP-0075408-1, "Header, 100mil, 4x2, Gold, TH", Color=Black, Current_A=6.3A, Manufacturer=Samtec, Supplier Part Number 1=SAM1028-04-ND, Voltage_V=550V, Cert_CSA=Y, Cert_CULUS=N, Cert_UL=Y, Cert_VDE=N, ClassName=Header, CNHeader=True, ComponentLink1Description="Datasheet URL", ComponentLink1URL=http://samtec.com/ftppub/pdf/TSW_TH.PDF, CompType=Header, ContactFinish=Gold, CT=False, Gender=Male, Green_EU RoHS=Passed, Green_EU RoHS-2=Passed, Green_Lifecycle=Active, Green_REACh=Passed, LatestRevisionDate=2017-07-12, MountType=TH, Orientation=Vertical, PackageReference="4x2 Header", PartNumber=TSW-104-07-G-D, PinCount=8, Pitch_mm=2.54, Publisher="Texas Instruments", RoHS=Y, Row_Count=2, RowSpacing_mm=2.54, Shrouded=N, Supplier 1=Digi-Key
J5 J6: library part CMP-0075407-1, "Header, 100mil, 3x1, Gold, TH", Color=Black, Current_A=6.3A, Manufacturer=Samtec, Supplier Part Number 1=SAM1029-03-ND, Voltage_V=550V, Cert_CSA=Y, Cert_CULUS=N, Cert_UL=Y, Cert_VDE=N, ClassName=Header, CNHeader=True, ComponentLink1Description="Datasheet URL", ComponentLink1URL=http://samtec.com/ftppub/pdf/TSW_TH.PDF, CompType=Header, ContactFinish=Gold, CT=False, Gender=Male, Green_EU RoHS=Passed, Green_EU RoHS-2=Passed, Green_Lifecycle=Active, Green_REACh=Passed, LatestRevisionDate=2017-07-12, MountType=TH, Orientation=Vertical, PackageReference="3x1 Header", PartNumber=TSW-103-07-G-S, PinCount=3, Pitch_mm=2.54, Publisher="Texas Instruments", RoHS=Y, Row_Count=1, Shrouded=N, Supplier 1=Digi-Key
J7: library part CMP-0075405-2, "Header, 100mil, 2x1, Gold, TH", Color=Black, Current_A=6.3A, Manufacturer=Samtec, Supplier Part Number 1=SAM1029-02-ND, Voltage_V=550V, Cert_CSA=Y, Cert_CULUS=N, Cert_UL=Y, Cert_VDE=N, ClassName=Header, ComponentLink1Description="Datasheet URL", ComponentLink1URL=http://samtec.com/ftppub/pdf/TSW_TH.PDF, CompType=Header, ContactFinish=Gold, Gender=Male, Green_EU RoHS=Passed, Green_EU RoHS-2=Passed, Green_Lifecycle=Active, Green_REACh=Passed, MountType=TH, Orientation=Vertical, PackageReference="2x1 Header", PartNumber=TSW-102-07-G-S, PinCount=2, Pitch_mm=2.54, RoHS=Y, Row_Count=1, Shrouded=N, Supplier 1=Digi-Key
LBL1: library part THT-14-423-10, "Thermal Transfer Printable Labels, 0.650\" W x 0.200\" H - 10,000 per roll", Manufacturer=Brady, Supplier Part Number 1=97C5133, ClassName=Label, ComponentLink1Description="Web Page", ComponentLink1URL=http://www.bradyid.com/bradyid/pdpv/THT-14-423-10.html, CompType=Label, Green_EU RoHS=Incomplete, Green_EU RoHS-2=Incomplete, Green_Lifecycle="Not Set", Green_REACh=Incomplete, LatestRevisionDate=2017-05-23, MountType=N/A, Note="Size: 0.65\" x 0.20 \"", PackageReference="PCB Label 0.650 x 0.200 inch", PartNumber=THT-14-423-10, Publisher="Texas Instruments", RoHS=Y, Supplier 1=Newark, Supplier 2=Farnell, Supplier Part Number 2=2065596, SymbolCreator=a0412235, SymbolVersion=2012-06-12
Logo2: library part Pb-Free, LatestRevisionDate=2016-03-21, Published=2009-03-03, Publisher="Texas Instruments", SymbolCreator=a0412235, SymbolVersion=2011-08-22
Logo3: library part FCC_disclaimer, "FCC_disclaimer", LatestRevisionDate=2016-03-21, Published=2009-03-03, Publisher="Texas Instruments", SymbolCreator=a0412235, SymbolVersion=2016-03-21
R1 R2 R3 R4: "RES, 1.00 k, 1%, 0.1 W, 0603", Manufacturer="Yageo America", Power_W=0.1, Supplier Part Number 1=311-1.00KHRCT-ND, TempCo="200 ppm/C", Tolerance_%=1, Value1=1%, Value2=0.1W, Value_Code=1k00, ValueDisplayed=1.00k, AEC Category=Q200, AEC Qualified=?, ComponentLink1Description="Datasheet link", ComponentLink1URL=http://www.yageo.com/pdf/Pu-RC0603_51_PbFree_L_2.pdf, CompType=Resistor, EIA_Code=E96, Green_EU RoHS="Passed with Exemption", Green_EU RoHS-2=Passed, Green_Lifecycle=Active, Green_REACh=Passed, LatestRevisionDate=2017-05-31, MountType=SMT, PackageReference=0603, PartNumber=RC0603FR-071KL, Published=2008-06-26, Publisher="Texas Instruments", Res_ohm=1000, RoHS=Y, SizeArea_mm2=1.28, SizeX_mm=1.6, SizeY_mm=0.8, SizeZ_mm=1, Supplier 1=Digi-Key, Supplier 2=Mouser, Supplier 3=Farnell, Supplier Part Number 2=603-RC0603FR-071KL, Supplier Part Number 3=9238484, SymbolVersion=2009-05-29, Technology="Thick Film", U/M=EA, VDC_V=150
R5 R6 R7 R8 R13 R14 R15 R16: "RES, 866, 1%, 0.1 W, 0603", Manufacturer=Vishay-Dale, Power_W=0.1, Supplier Part Number 1=541-866HCT-ND, TempCo="100 ppm/C", Tolerance_%=1, Value1=1%, Value2=0.1W, Value_Code=866R, ValueDisplayed=866, AEC Category=Q200, AEC Qualified=?, ComponentLink1Description="Datasheet link", ComponentLink1URL=http://www.vishay.com/docs/20035/dcrcwe3.pdf, CompType=Resistor, EIA_Code=E96, Green_EU RoHS="Passed with Exemption", Green_EU RoHS-2=Passed, Green_Lifecycle=Active, Green_REACh=Passed, LatestRevisionDate=2017-05-31, MountType=SMT, PackageReference=0603, PartNumber=CRCW0603866RFKEA, Published=2008-06-26, Publisher="Texas Instruments", Res_ohm=866, RoHS=Y, SizeArea_mm2=1.28, SizeX_mm=1.6, SizeY_mm=0.8, SizeZ_mm=1, Supplier 1=Digi-Key, Supplier 2=Newark, Supplier 3=Mouser, Supplier Part Number 2=52K8754, Supplier Part Number 3=71-CRCW0603-866-E3, SymbolVersion=2009-05-29, Technology="Thick Film", U/M=EA, VDC_V=75
R9 R10 R11 R12 R17 R18 R19 R20: "RES, 95.3, 1%, 0.1 W, 0603", Manufacturer=Vishay-Dale, Power_W=0.1, Supplier Part Number 1=541-95.3HCT-ND, TempCo="100 ppm/C", Tolerance_%=1, Value1=1%, Value2=0.1W, Value_Code=95R3, ValueDisplayed=95.3, AEC Category=Q200, AEC Qualified=?, ComponentLink1Description="Datasheet link", ComponentLink1URL=http://www.vishay.com/docs/20035/dcrcwe3.pdf, CompType=Resistor, EIA_Code=E96, LatestRevisionDate=2017-05-31, MountType=SMT, PackageReference=0603, PartNumber=CRCW060395R3FKEA, Published=2008-06-26, Publisher="Texas Instruments", Res_ohm=95.3, RoHS=Y, SizeArea_mm2=1.28, SizeX_mm=1.6, SizeY_mm=0.8, SizeZ_mm=1, Supplier 1=Digi-Key, Supplier 2=Mouser, Supplier 3=Farnell, Supplier Part Number 2=71-CRCW0603-95.3-E3, Supplier Part Number 3=1878639, SymbolVersion=2009-05-29, Technology="Thick Film", U/M=EA, VDC_V=75
R21 R22 R23 R24: "RES, 100 k, 0.1%, 0.1 W, 0603", Manufacturer="Yageo America", Power_W=0.1, Supplier Part Number 1=603-RT0603BRD07100KL, TempCo="25 ppm/C", Value1=0.1%, Value2=0.1W, Value_Code=100k, AEC Category=Q200, AEC Qualified=?, ComponentLink1Description="Datasheet link", ComponentLink1URL=http://www.yageo.com/pdf/PYu-RT_1-to-0.05_RoHS_L_3.pdf, CompType=Resistor, EIA_Code=E192, Green_EU RoHS="Passed with Exemption", Green_EU RoHS-2=Passed, Green_Lifecycle=Active, Green_REACh=Passed, LatestRevisionDate=2017-05-31, MountType=SMT, PackageReference=0603, PartNumber=RT0603BRD07100KL, Published=2008-06-26, Publisher="Texas Instruments", Res_ohm=100000, RoHS=Y, SizeArea_mm2=1.28, SizeX_mm=1.6, SizeY_mm=0.8, SizeZ_mm=1, Supplier 1=Mouser, SymbolVersion=2009-05-29, Technology="Thin Film", Tolerance_%=0.1, U/M=EA, ValueDisplayed=100k, VDC_V=75
R25 R26 R27 R28: "RES, 24.9 k, 0.1%, 0.1 W, 0603", Manufacturer="Yageo America", Power_W=0.1, TempCo="25 ppm/C", Value1=0.1%, Value2=0.1W, Value_Code=24k9, ValueDisplayed=24.9k, AEC Category=Q200, AEC Qualified=?, ComponentLink1Description="Datasheet link", ComponentLink1URL=http://www.yageo.com/pdf/PYu-RT_1-to-0.05_RoHS_L_3.pdf, CompType=Resistor, EIA_Code=E192, LatestRevisionDate=2017-05-31, MountType=SMT, PackageReference=0603, PartNumber=RT0603BRD0724K9L, Published=2008-06-26, Publisher="Texas Instruments", Res_ohm=24900, RoHS=Y, SizeArea_mm2=1.28, SizeX_mm=1.6, SizeY_mm=0.8, SizeZ_mm=1, SymbolVersion=2009-05-29, Technology="Thin Film", Tolerance_%=0.1, U/M=EA, VDC_V=75
R29 R30 R31 R32: "RES, 0, 1%, 0.1 W, AEC-Q200 Grade 0, 0603", Manufacturer="Stackpole Electronics Inc", Power_W=0.1, Supplier Part Number 1=RMCF0603ZT0R00CT-ND, TempCo=ppm/C, Tolerance_%=1, Value1=1%, Value2=0.1W, Value_Code=0, AEC Category=Q200, AEC Grade=0, AEC Qualified=Y, ComponentLink1Description="Datasheet link", ComponentLink1URL=https://www.seielect.com/Catalog/SEI-RMCF_RMCP.pdf, CompType=Resistor, Green_EU RoHS="Passed with Exemption", Green_EU RoHS-2=Incomplete, Green_Lifecycle=Active, Green_REACh=Passed, LatestRevisionDate=2017-05-31, MountType=SMT, PackageReference=0603, PartNumber=RMCF0603ZT0R00, Published=2008-06-26, Publisher="Texas Instruments", Res_ohm=0, RoHS=Y, SizeArea_mm2=1.28, SizeX_mm=1.6, SizeY_mm=0.8, SizeZ_mm=1, Supplier 1=Digi-Key, SymbolVersion=2009-05-29, Technology="Thick Film", U/M=EA, ValueDisplayed=0
R35 R36 R37 R38: "RES, 200, 1%, 0.063 W, 0402", Manufacturer=Vishay-Dale, Power_W=0.063, Supplier Part Number 1=541-200LCT-ND, TempCo="100 ppm/C", Tolerance_%=1, Value1=1%, Value2=0.063W, Value_Code=200R, ValueDisplayed=200, AEC Category=Q200, AEC Qualified=?, ComponentLink1Description="Datasheet link", ComponentLink1URL=http://www.vishay.com/docs/20035/dcrcwe3.pdf, CompType=Resistor, EIA_Code=E96, Green_EU RoHS="Passed with Exemption", Green_EU RoHS-2=Passed, Green_Lifecycle=Active, Green_REACh=Passed, LatestRevisionDate=2017-06-03, MountType=SMT, PackageReference=0402, PartNumber=CRCW0402200RFKED, Published=2008-06-26, Publisher="Texas Instruments", Res_ohm=200, RoHS=Y, SizeArea_mm2=0.5, SizeX_mm=1, SizeY_mm=0.5, SizeZ_mm=0.6, Supplier 1=Digi-Key, Supplier 2=Newark, Supplier 3=Mouser, Supplier Part Number 2=52K6826, Supplier Part Number 3=71-CRCW0402-200-E3, SymbolVersion=2009-05-29, Technology="Thick Film", U/M=EA, VDC_V=50
R39 R40 R41 R42: "RES, 10, 5%, 0.25 W, 0603", Manufacturer=Vishay-Dale, Power_W=0.25, Supplier Part Number 1=541-10SACT-ND, TempCo="200 ppm/C", Tolerance_%=5, Value1=5%, Value2=0.25W, Value_Code=10R0, ValueDisplayed=10, AEC Category=Q200, AEC Qualified=?, ComponentLink1Description="Datasheet link", ComponentLink1URL=http://www.vishay.com/docs/20043/crcwhpe3.pdf, CompType=Resistor, EIA_Code=E24, Green_EU RoHS="Passed with Exemption", Green_EU RoHS-2=Passed, Green_Lifecycle=Active, Green_REACh=Passed, LatestRevisionDate=2017-05-31, MountType=SMT, PackageReference=0603, PartNumber=CRCW060310R0JNEAHP, Published=2008-06-26, Publisher="Texas Instruments", Res_ohm=10, RoHS=Y, SizeArea_mm2=1.28, SizeX_mm=1.6, SizeY_mm=0.8, SizeZ_mm=1, Supplier 1=Digi-Key, Supplier 2=Mouser, Supplier 3=Farnell, Supplier Part Number 2=71-CRCW060310R0JNEAH, Supplier Part Number 3=24T7074, SymbolVersion=2009-05-29, Technology="Thick Film", U/M=EA, VDC_V=75
R43 R44: "RES, 10 k, 5%, 0.063 W, 0402", Manufacturer=Vishay-Dale, Power_W=0.063, Supplier Part Number 1=541-10KJCT-ND, TempCo="200 ppm/C", Tolerance_%=5, Value1=5%, Value2=0.063W, Value_Code=10k0, ValueDisplayed=10k, AEC Category=Q200, AEC Qualified=?, ComponentLink1Description="Datasheet link", ComponentLink1URL=http://www.vishay.com/docs/20035/dcrcwe3.pdf, CompType=Resistor, EIA_Code=E24, Green_EU RoHS="Passed with Exemption", Green_EU RoHS-2=Passed, Green_Lifecycle=Active, Green_REACh=Passed, LatestRevisionDate=2017-06-03, MountType=SMT, PackageReference=0402, PartNumber=CRCW040210K0JNED, Published=2008-06-26, Publisher="Texas Instruments", Res_ohm=10000, RoHS=Y, SizeArea_mm2=0.5, SizeX_mm=1, SizeY_mm=0.5, SizeZ_mm=0.6, Supplier 1=Digi-Key, Supplier 2=Newark, Supplier 3=Mouser, Supplier Part Number 2=59M6696, Supplier Part Number 3=71-CRCW0402J-10K-E3, SymbolVersion=2009-05-29, Technology="Thick Film", U/M=EA, VDC_V=50
U1 U2 U3 U4 U5 U6 U7 U8: "Single-High-Voltage, Low Distortion, Current-Feedback Operational Amplifier with Power-Down, 10 to 30 V, -40 to 85 degC, 8-pin SOIC (D8), Green (RoHS & no Sb/Br)", Alternate Manufacturer="Texas Instruments", Alternate PartNumber=Equivalent, Supplier Part Number 1=296-16672-5-ND, 2nd Harmonic(dBc)=66, 3rd Harmonic(dBc)=74, @ MHz=10, Acl, min stable gain(V/V)=1, BW @ Acl(MHz)=210, Code_JEDEC=MS-012, ComponentLink1Description="Manufacturer URL", ComponentLink1URL=http://www.ti.com/, ComponentLink2Description=Datasheet, ComponentLink2URL=http://www.ti.com/general/docs/lit/getliterature.tsp?genericPartNumber=THS3095&fileType=pdf, ComponentLink3Description="Package Specification", ComponentLink3URL=http://www.ti.com/litv/pdf/msoi002j, DatasheetVersion=SLOS423G, Diff Gain(%)=0.013, Diff Phase(deg)=0.02, Eco-Plan="Green (RoHS & no Sb/Br)", Iib(Max)(nA)=20000, Io(Typ)(mA)=250, Iq per channel(Max)(mA)=11, Manufacturer="Texas Instruments", MountType=SMT, Number of Channels=1, PackageDescription="8-Pin Plastic Small Outline, Body 4.9 x 3.9 mm, Pitch 1.27 mm", PackageReference=D0008A, PackageVersion="4040047-3/M, 06/2011", PartNumber=THS3095D, Settling Time (0.1%)(Typ)(ns)=42, Slew Rate(Typ)(V/us)=7300, Sub Family="High Output Current Amplifier (>=50mA), High Speed Amplifier (>=50MHz), High Supply Voltage Amplifier (>=30V)", Supplier 1=Digi-Key, Supplier 2=Newark, Supplier 3=Mouser, Supplier Part Number 2=90H4521, Supplier Part Number 3=595-THS3095D, THD (Fc is 1 MHz)(Typ)(dB)=-75, Vio(Max)(mV)=4, Vn at Flatband(Typ)(nV/rtHz)=2, Vs(Max)(V)=30, Vs(Min)(V)=10
U9 U10 U11 U12: "Single 5-Ohm SP3T Analog Switch 5-V/3.3-V 3:1 Analog Multiplexer/Demultiplexer, DCU0008A (VSSOP-8)", Alternate Manufacturer="Texas Instruments", Alternate PartNumber=TS5A3357DCUT, ComponentLink1Description="Datasheet Link", ComponentLink1URL=http://www.ti.com/lit/ds/symlink/ts5a3357.pdf, CompType=IC, LatestRevisionDate=2017-06-05, Manufacturer="Texas Instruments", MountType=SMT, PackageDescription=VSSOP-8, PackageReference=DCU0008A, PartNumber=TS5A3357DCUR, Publisher="Texas Instruments", RoHS=Y, SizeArea_mm2=6.4, SizeAreaWB_mm2=12.6, SizeX_mm=3.2, SizeY_mm=2, SizeZ_mm=0.9, SymbolCreator=Altium, SymbolVersion=2016-3-1, U/M=EA
U13: "Single 2-Input Positive-AND Gate, DBV0005A, LARGE T&R", Alternate Manufacturer="Texas Instruments", Alternate PartNumber=Equivalent, F @ Nom Voltage(Max)(Mhz)=150, Generic Part Number=SN74LVC1G08, ICC @ Nom Voltage(Max)(mA)=0.01, Operating Temperature Range(C)="-40 to 125,-40 to 85", Rating=Catalog, Supplier Part Number 1=595-SN74LVC1G08DBVR, tpd @ Nom Voltage(Max)(ns)=4.5,6,4,5, Voltage(Nom)(V)=1.8,2.5,3.3,5, 3-State Output=No, Bits(#)=1, ComponentLink1Description="Manufacturer URL", ComponentLink1URL=http://www.ti.com/, ComponentLink2Description=Datasheet, ComponentLink2URL=http://www.ti.com/lit/ds/symlink/sn74lvc1g08.pdf, DatasheetVersion=SCES217Y, Gate Type=AND, Input Type=CMOS/TTL, Logic=True, Manufacturer="Texas Instruments", Output Drive (IOL/IOH)(Max)(mA)=32/-32, Output Type=CMOS, PackageReference=DBV0005A, PartNumber=SN74LVC1G08DBVR, Schmitt Trigger=No, Sub-Family="AND Gate", Supplier 1=Mouser, Supplier 2=Digi-Key, Supplier 3=Digi-Key, Supplier 4=Digi-Key, Supplier Part Number 2=296-11601-2-ND, Supplier Part Number 3=296-11601-1-ND, Supplier Part Number 4=296-11601-6-ND, Technology Family=LVC, VCC(Max)(V)=5.5, VCC(Min)(V)=1.65
ZZ1: library part AssemblyNoteLabel, ClassName=AssemblyNote, CompType=AssemblyNote, LatestRevisionDate=2017-05-23, Publisher="Texas Instruments", SymbolCreator=a0412235, SymbolVersion=2012-06-14
ZZ2 ZZ3 ZZ4: library part AssemblyNote, ClassName=AssemblyNote, CompType=AssemblyNote, LatestRevisionDate=2017-05-23, Publisher="Texas Instruments", SymbolCreator=codlsc, SymbolVersion=2010-05-18

## Via types
v1: diameter 34, hole 16, Top Layer to Bottom Layer, 129 vias
v2: diameter 40, hole 20, Top Layer to Bottom Layer, 6 vias
v3: diameter 26, hole 10, Top Layer to Bottom Layer, 2 vias

## Nets (pads, with @x,y where several pads share a name; then routed paths per layer and width w, separated by ;. In a path a pad name is that pad's centre, name@x,y a point inside that pad or via, vN(x,y) a via of type N, cw(c..) or ccw(c..) an arc to the next point about the centre after c; other vN are vias at no path point)
3.3V: C55.1 C56.1 C57.1 C58.1 J1.1 J6.3 R43.1 R44.1 U9.8 U10.8 U11.8 U12.8 U13.5 | length 788.6
  Top Layer w10: v1(100,1900) R44.1@100,1966.38 ; U12.8@210.47,2016.38 285,2016.38 v1@328.62,2016.38 ; v1(290,1805) 327.6,1805 U13.5@332.6,1800 ; v1(480,1910) 480.32,1910.32 R43.1@480.32,1966.37 ; U11.8@599.84,2017.01 659.37,2017.01 C55.1@660,2016.38 v1@706.38,2016.38 ; U9.8@1239.53,177.01 C57.1@1309.37,177.01 ; U10.8@2809.53,177.01 C58.1@2869.37,177.01
  Top Layer w30: C57.1@1310,176.38 v1@1376.38,176.38 ; C58.1@2870,176.38 v1@2946.38,176.38
  Signal Layer 2 w50: 1240,2190 1300,2190 J1.1@1345,2235
  other v1: 1385,175 2955,175 325,2015 715,2015
+15V: C9.1 C11.1 C13.1 C15.1 C17.1 C18.1 C19.1 C20.1 C31.1 C32.1 C33.1 C34.1 C35.1 C36.1 C37.1 C38.1 J5.1 U1.7 U2.7 U3.7 U4.7 U5.7 U6.7 U7.7 U8.7 | length 3447.9
  Top Layer w15: v1(995,665) U5.7@995,732.4 ; v1(1995,675) U7.7@1995,732.4 ; v1@2819.04,670.96 U6.7@2819.04,730.87 ; v1(3625,675) U8.7@3625,732.72
  Top Layer w20: v1@2795,2375 U2.7@2795,2419.52
  Top Layer w25: U1.7@999.04,2420.87 1000,2419.91 v1(1000,2360) ; v1(1745,2365) U3.7@1745,2419.2 ; v1@3521.5,2371.5 U4.7@3521.5,2419.52
  Bottom Layer w15: C17.1@993.62,610 v1@993.62,663.62 ; C19.1@1993.62,610 v1@1993.62,673.62 ; C18.1@2820.12,610.5 v1@2820.12,666.88 ; C20.1@3623.62,610 v1@3623.62,673.62
  Bottom Layer w20: C11.1@2793.62,2320 v1@2793.62,2363.62
  Bottom Layer w25: C13.1@1745,2308.62 v1(1745,2365) ; C15.1@3523.62,2310 v1@3523.62,2356.38
  Bottom Layer w30: v1(1000,2360) 1000,2239.11 999.04,2238.15 1007.19,2230 v1(1070,2230) ; C32.1@2791.18,2240 C11.1@2791.18,2317.56 ; C18.1@2823.62,610 2823.62,532.44 C36.1@2821.18,530 v1(2900,530) ; C20.1@3623.62,610 3623.62,532.44 C38.1@3621.18,530 v1(3710,530)
  Bottom Layer w35: C17.1@993.62,610 993.62,522.44 C35.1@991.18,520 v1(1080,520) ; C13.1@1743.62,2320 1743.62,2240 1753.62,2230 v1(1830,2230) ; C19.1@1993.62,610 1993.62,532.44 C37.1@1991.18,530 v1(2070,530) ; C32.1@2791.18,2240 2801.18,2230 v1(2870,2230) ; C15.1@3521.18,2317.56 3521.18,2240 3531.18,2230 v1(3600,2230)
  Bottom Layer w100: J5.1@3820,1650 3820,1370 3920,1270 v2(3920,435)
  other v1: 2820,670 3520,2360 2795,2365
  other v2: 3920,490 3920,550 3820,1455 3820,1505 3820,1555
-15V: C10.1 C12.1 C14.1 C16.1 C27.2 C28.2 C29.2 C30.2 C39.1 C40.2 C41.1 C42.2 C43.1 C44.2 C45.1 C46.2 J5.3 U1.4 U2.4 U3.4 U4.4 U5.4 U6.4 U7.4 U8.4 | length 2096.2
  Top Layer w15: C27.2@716.48,2632.09 C10.1@814.04,2632.09 U1.4@895.7,2632.09 ; C41.1@2640,943.62 2641.81,945.43 U6.4@2719.04,945.43
  Top Layer w20: C40.2@740,951.18 C40.2@747.56,943.62 ; C39.1@830,943.62 833.35,946.97 U5.4@895,946.97 ; C14.1@1560,2633.62 1560.15,2633.77 U3.4@1645,2633.77 ; C43.1@1830,943.62 1833.35,946.97 U7.4@1895,946.97 ; C12.1@2610,2630.42 2613.66,2634.09 U2.4@2695,2634.09 ; C45.1@3437.56,941.18 C45.1@3440,943.62 3443.66,947.28 U8.4@3525,947.28
  Top Layer w25: C16.1@3330,2633.62 3330.46,2634.09 U4.4@3421.5,2634.09
  Top Layer w30: v1(654.36,2628.15) 655.54,2629.33 C27.2@734.36,2629.33 ; v1(658.82,951.18) C40.2@740,951.18 ; C40.2@747.56,943.62 C39.1@830,943.62 ; v1(1370,2630) 1371.18,2631.18 C29.2@1470,2631.18 ; C29.2@1472.44,2633.62 C14.1@1560,2633.62 ; v1@1661.18,941.18 C44.2@1740,941.18 1742.44,943.62 C43.1@1830,943.62 ; v1@2461.18,941.18 C42.2@2550,941.18 2552.44,943.62 C41.1@2640,943.62 ; C28.2@2508.82,2630 C28.2@2510,2631.18 2510.76,2630.42 C12.1@2610,2630.42 ; v1(3130,2630) 3131.18,2631.18 C30.2@3230,2631.18 3232.44,2633.62 C16.1@3330,2633.62 ; v1(3340,1010) C46.2@3340,941.18 C45.1@3437.56,941.18
  Top Layer w35: v1(2420,2630) C28.2@2508.82,2630
  other v1: 1660,940 2460,940
CH0_IN: C26.1 R29.2 U5.3 | length 1955.1
  Top Layer w15: U5.3@945,946.97 945,1155 v1(930,1170) 930,1519 1195,1784 1548,1784 1687,1784 1687,1818.07 1717,1818.07 1717,1784 1717,1749.93 1747,1749.93 1747,1784 1762,1784 1785,1784 1851,1850 C26.1@1973.5,1850 C26.1@1975,1850
  Bottom Layer w15: R29.2@871.5,1170 v1(930,1170)
CH0_OUT: R5.2 R38.2 U1.6 | length 2015.3
  Top Layer w15: U1.6@949.04,2420.87 949.04,2345.96 970,2325 ; R5.2@1164.04,2516.97 R5.2@1170,2511.01 ; R5.2@1170,2508.5 1170,2375 1120,2325 970,2325 ; R38.2@1985,1920 1845,1920 1830,1920 1830,1890.8 1800,1890.8 1800,1920 1800,1949.2 1770,1949.2 1770,1920 1770,1890.8 1740,1890.8 1740,1920 1740,1949.2 1710,1949.2 1710,1920 1620,1920 1580,1920 1515,1985 1085,1985 970,2100 970,2325
CH0_R: D1.1 D5.2 R39.2 U9.1 | length 1112.6
  Top Layer w10: D5.2@575,621.01 575,530 640,465 1145,465 1239.53,370.47 U9.1@1239.53,302.99
  Top Layer w15: D5.2@575,621.01 D1.1@690,620.2 R39.2@798.5,620.2
CH0_T: C1.2 U11.2 | length 3678.7